# EAGLE board thundermaus (EAGLE 6.3)
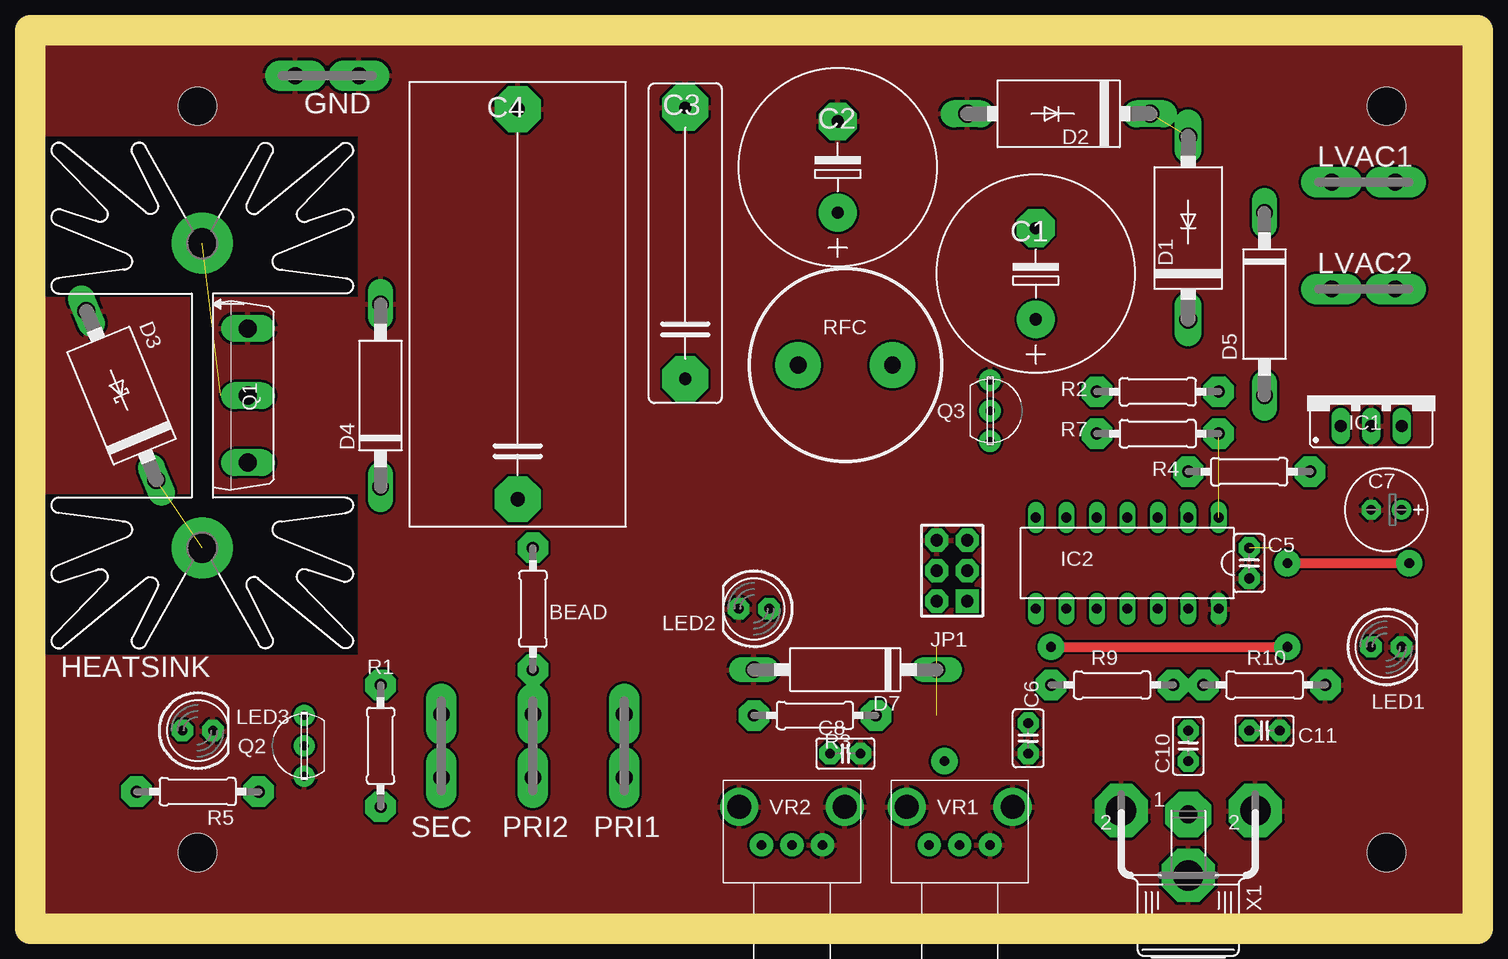
[diagram p0: board, top side]
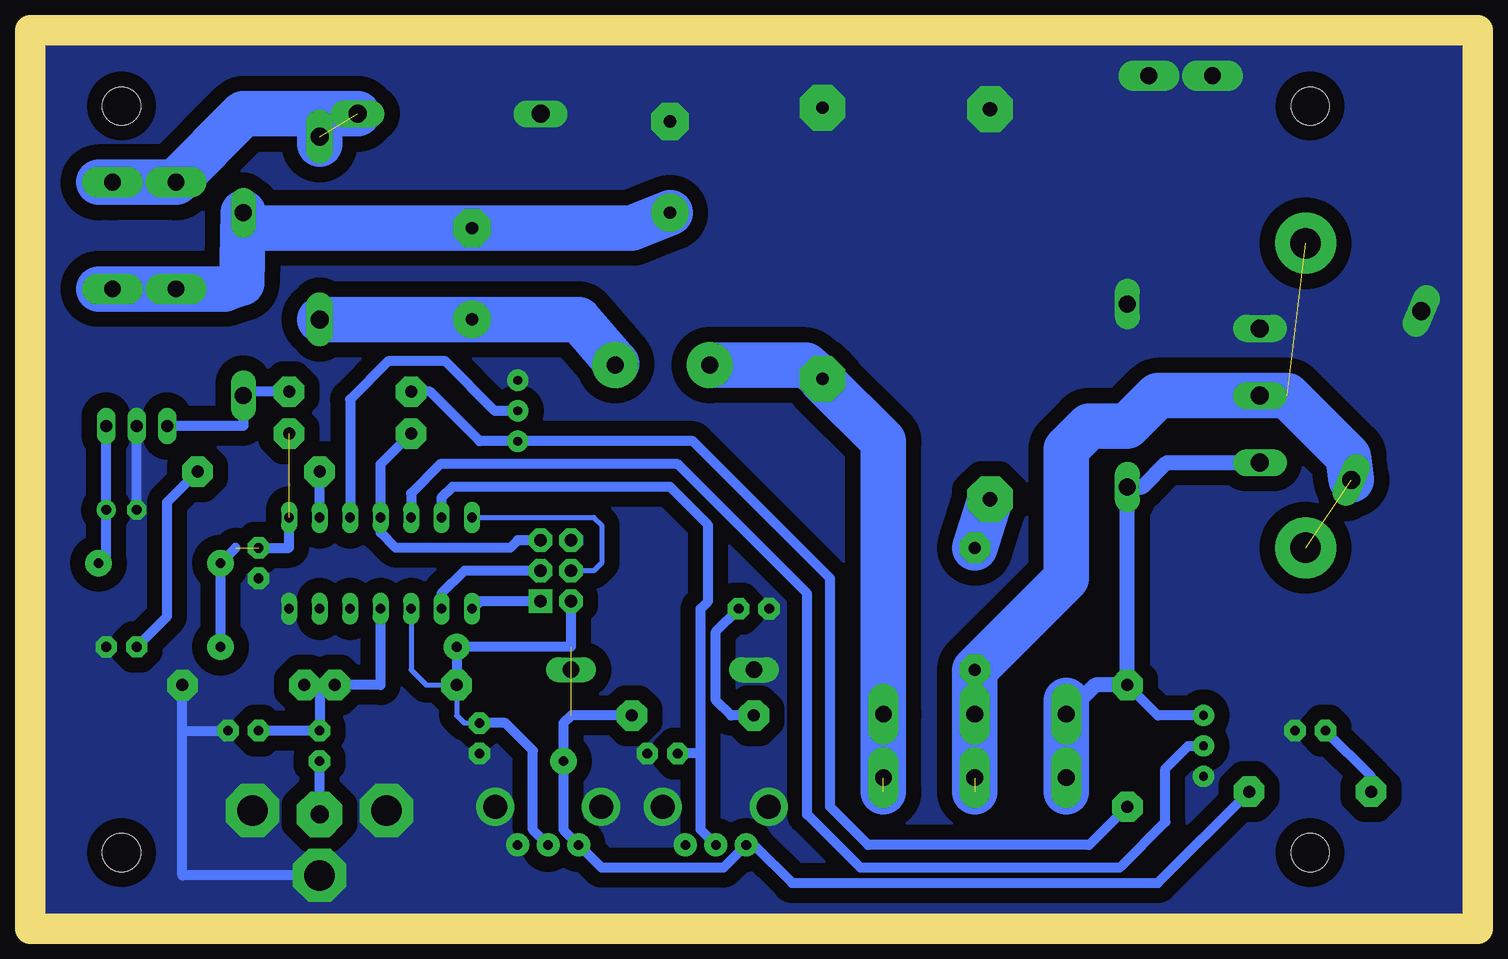
[diagram p1: board, bottom side, seen from below]

Size 120.65 x 74.93 mm. Coordinates in mm from the lower left corner, seen from the top.
Outline: 120.65,0 0,0 0,74.93 120.65,74.93 120.65,0
Copper layers (1*16): Top 0.035mm / dielectric 1.5mm / Bottom 0.035mm
Design rules "default *": minimum track width 10mil, minimum drill 24mil, track to track 8mil, track to pad 8mil, pad to pad 8mil, via to via 8mil, smd to smd 8mil, copper to edge 0mil, drill to drill 0mil, minimum pad ring 10mil, minimum via ring 8mil, stop-mask expansion 4mil, vias tented up to drill 0mil, thermal gap 10mil
Holes 3.17 mm at 113.03,68.58 13.97,68.58 13.97,6.35 113.03,6.35

## Footprints (pad centres in the part's own frame; a part is rotated, then mirrored left to right if it is on the bottom)
0207/10 = drill 1 pad 2.54 octagon: 1 -5.08,0; 2 5.08,0
E7,5-16 = drill 1.016 pad 3.15: + -3.81,0 | drill 1.016 pad 3.15 octagon: - 3.81,0
C225-062X268 = drill 1.016 pad 3.81 octagon: 1 -11.303,0; 2 11.303,0
C325-182X374 = drill 1.194 pad 3.81 octagon: 1 -16.256,0; 2 16.256,0
C025-025X050 = drill 0.813 pad 1.778 octagon: 1 -1.27,0; 2 1.27,0
E2,5-7 = drill 0.813 pad 1.6: + -1.27,0 | drill 0.813 pad 1.6 octagon: - 1.27,0
DO201-15 = drill 1.499 long: A 7.62,0; C -7.62,0
DO201T15 = drill 1.499 long: A 7.62,0; C -7.62,0
C1702-15 = drill 1.397 long: A 7.62,0; C -7.62,0
F061.060 = drill 1.4 pad 2.54 long: A1 -2.65,0; A2 2.65,0
SK129 = drill 2.54 pad 5.08: A2,5 -12.7,-0.889; B2,5 12.7,-0.889
78XXS = drill 1.016 long: GND 0,-2.54; IN -2.54,-2.54; OUT 2.54,-2.54
DIL14 = drill 0.813 long: 1 -7.62,-3.81; 2 -5.08,-3.81; 3 -2.54,-3.81; 4 0,-3.81; 5 2.54,-3.81; 6 5.08,-3.81; 7 7.62,-3.81; 8 7.62,3.81; 9 5.08,3.81; 10 2.54,3.81; 11 0,3.81; 12 -2.54,3.81; 13 -5.08,3.81; 14 -7.62,3.81
AVR-ISP-6 = drill 1.016 pad 1.93 square: 1 -2.54,-1.27 | drill 1.016 pad 1.93 octagon: 2 -2.54,1.27; 3 0,-1.27; 4 0,1.27; 5 2.54,-1.27; 6 2.54,1.27
LED5MM = drill 0.813 pad 1.778 octagon: A -1.27,0; K 1.27,0
TO247BV = drill 1.499 long: D 0,-2.921; G -5.588,-2.921; S 5.588,-2.921
TO237-SW = drill 0.737 pad 1.778: 1 2.54,0; 2 0,0; 3 -2.54,0
TJ4-U1 = drill 1.4 pad 3.81: 1 -3.935,0; 2 3.935,0
PTV09 = drill 0.8 pad 1.93: P1 -2.54,3.175; P2 0,3.175; P3 2.54,3.175 | drill 2 pad 3.175: P$4 4.407,6.35; P$5 -4.407,6.35
TOBU3 = drill 1.5 pad 3.81 octagon: 1 0,0 | drill 2.54 pad 4.445 octagon: 2 5.588,-0.318; 2@1 -5.588,-0.318; 2@2 0,5.08

## Placement (x,y rotation side)
BEAD  28B0500-100  [0207/10]  41.91,26.67 90 top
C1  2200u, 50v  [E7,5-16]  83.82,54.61 90 top
C2  2200u, 50v  [E7,5-16]  67.31,63.5 90 top
C3  1u  [C225-062X268]  54.61,57.15 90 top
C4  715P473512MD3  [C325-182X374]  40.64,52.07 90 top
C5  0.1u  [C025-025X050]  101.6,30.48 270 top
C6  0.1u  [C025-025X050]  83.19,15.88 270 top
C7  220u, 16V  [E2,5-7]  113.03,34.93 180 top
C8  0.1u  [C025-025X050]  67.94,14.61 0 top
C10  1u  [C025-025X050]  96.52,15.24 90 top
C11  100p  [C025-025X050]  102.87,16.51 0 top
D1  1N5401  [DO201-15]  96.52,58.42 90 top
D2  1N5401  [DO201-15]  85.72,67.94 180 top
D3  1.5KE350  [DO201T15]  7.62,44.45 112.5 top
D4  1N5353  [C1702-15]  29.21,44.45 90 top
D5  1N5353  [C1702-15]  102.87,52.07 270 top
D7  1N5353  [C1702-15]  67.94,21.59 180 top
GND  Keystone 1289  [F061.060]  24.77,71.12 0 top
HEATSINK  657-15ABP  [SK129]  15.24,44.45 270 top
IC1  LM7805  [78XXS]  111.76,44.45 0 top
IC2  TINY24/44/84-PU  [DIL14]  91.44,30.48 180 top
JP1  AVR-ISP-6VERT  [AVR-ISP-6]  76.83,29.84 90 top
LED1  [LED5MM]  113.03,23.5 0 top
LED2  [LED5MM]  60.33,26.67 180 top
LED3  [LED5MM]  13.97,16.51 0 top
LVAC1  Keystone 1289  [F061.060]  111.12,62.23 0 top
LVAC2  Keystone 1289  [F061.060]  111.12,53.34 0 top
PRI1  Keystone 1289  [F061.060]  49.53,15.24 270 top
PRI2  Keystone 1289  [F061.060]  41.91,15.24 270 top
Q1  FGH20N60SFD  [TO247BV]  15.24,44.45 90 top
Q2  2n7000  [TO237-SW]  22.86,15.24 90 top
Q3  2n7000  [TO237-SW]  80.01,43.18 270 top
R1  1k  [0207/10]  29.21,15.24 270 top
R2  4.7k  [0207/10]  93.98,44.77 0 top
R3  470.  [0207/10]  65.41,17.78 180 top
R4  470.  [0207/10]  101.6,38.1 0 top
R5  470.  [0207/10]  13.97,11.43 180 top
R7  10k  [0207/10]  93.98,41.28 180 top
R9  100k  [0207/10]  90.17,20.32 180 top
R10  100k  [0207/10]  102.87,20.32 180 top
RFC  LVP1620-250KL  [TJ4-U1]  67.94,46.99 180 top
SEC  Keystone 1289  [F061.060]  34.29,15.24 270 top
VR1  [PTV09]  77.47,3.81 0 top
VR2  [PTV09]  63.5,3.81 0 top
X1  TOBU3  [TOBU3]  96.52,9.53 180 top

## Library data of the parts
BEAD C1-C8 C10 C11 R1-R5 R7 R9 R10 RFC = rcl
D1-D5 D7 = diode
GND LVAC1 LVAC2 PRI1 PRI2 SEC = con-faston
HEATSINK = heatsink
IC1 = v-reg
IC2 JP1 = avr-7
LED1-LED3 = led
Q1 = transistor-power
Q2 Q3 = transistor-fet
VR1 VR2 = pot2
X1 = con-hirschmann

## Nets
5V: C5.1 C7.+ D7.C IC1.OUT IC2.1 JP1.2 R3.1 R5.1 R7.1 R9.2 VR1.P1 VR2.P1
16V: D5.A IC1.IN R2.2
70VDC: C1.+ D1.C RFC.1
AUDIO: C10.2 C11.1 IC2.11 R9.1 R10.2
AUDIO-IN: C10.1 X1.1
COLLECTOR: BEAD.1 D3.C HEATSINK.A2,5 HEATSINK.B2,5 PRI2.A1 PRI2.A2 Q1.D
GATE: D4.C Q1.G Q2.1 R1.1 SEC.A1 SEC.A2
GND: C2.- C3.2 C4.2 C5.2 C6.2 C7.- C8.2 C11.2 D2.A D3.A D4.A D7.A GND.A1 GND.A2 IC1.GND IC2.14 JP1.6 LED1.K LED2.K LED3.K Q1.S Q2.3 Q3.3 R10.1 VR1.P3 VR1.P$4 VR1.P$5 VR2.P3 VR2.P$4 VR2.P$5 X1.2 X1.2@1 X1.2@2
HVDC: C3.1 PRI1.A1 PRI1.A2 RFC.2
LED: IC2.2 R4.1
LED2-P: LED2.A R3.2
LED3-P: LED3.A R5.2
LEDP: LED1.A R4.2
LVAC1: D1.A D2.C LVAC1.A1 LVAC1.A2
LVAC2: C1.- C2.+ D5.C LVAC2.A1 LVAC2.A2
MISO: IC2.8 JP1.1
MOSI: IC2.7 JP1.4
PA3: C6.1 IC2.10 VR1.P2
PA7: C8.1 IC2.6 VR2.P2
PB1: IC2.3 Q3.2
PB2: IC2.5 Q2.2
PULLUP_DISABLE: Q3.1 R1.2 R2.1
RESONANT: BEAD.2 C4.1
RST: IC2.4 JP1.5 R7.2
SCK: IC2.9 JP1.3

## Tracks (layer width: path | path; a pad name or v marks a point on that pad's centre or on a via)
5V  (via drill 0.8 pad 2.18)  (4 unrouted)
  Top 0.813: v85.09,23.5 v104.77,23.5 | v104.77,30.48 v114.94,30.48
  Bottom 0.813: C5.1 99.06,31.75 IC2.1 | IC1.OUT C7.+ 114.3,31.11 v114.94,30.48 | 84.45,23.5 v85.09,23.5 | 84.45,23.5 75.56,23.5 JP1.2 | R9.2 85.09,22.86 84.45,23.5 | v104.77,23.5 v104.77,30.48 103.5,31.75 | R3.1 75.56,17.78 76.2,17.14 v76.2,13.97 76.2,8.26 VR1.P1 73.02,5.08 62.87,5.08 VR2.P1 60.33,6.98 57.15,3.81 26.67,3.81 R5.1
16V
  Bottom 0.813: IC1.IN 102.87,41.91 D5.A 102.87,44.77 R2.2
70VDC
  Bottom 3.81: D1.C C1.+ 74.93,50.8 71.75,47.12 RFC.1
AUDIO
  Bottom 0.813: 96.52,20.32 C10.2 C11.1 | 96.52,20.32 R10.2 | 96.52,20.32 R9.1 91.44,20.32 IC2.11
AUDIO-IN
  Bottom 0.813: X1.1 C10.1
COLLECTOR  (3 unrouted)
  Bottom 3.81: 41.91,11.43 PRI2.A1 BEAD.1 34.29,29.21 34.29,40.01 32.38,41.91 29.21,41.91 26.67,44.45 Q1.D 15.88,44.45 10.79,39.37 D3.C
GATE
  Bottom 0.813: 29.21,36.2 28.57,36.83 | Q2.1 26.67,17.78 R1.1
  Bottom 1.27: Q1.G 25.91,38.86 27.94,36.83 28.57,36.83 D4.C | 33.55,17.89 SEC.A1 31.86,20.32 R1.1 29.21,36.2
  Bottom 3.81: 34.29,19.05 SEC.A1 SEC.A2 34.29,11.43
GND
  Bottom 0.813: C7.- IC1.GND | 107.95,16.51 R10.1 | 107.95,16.51 107.95,4.45 X1.2@2 | 107.95,16.51 C11.2
  pour Bottom (isolate 1.27, no thermals): 119.38,1.27 119.38,73.66 1.27,73.66 1.27,1.27
  pour Top: 1.27,73.66 119.38,73.66 119.38,1.27 1.27,1.27
HVDC  (1 unrouted)
  Bottom 3.81: RFC.2 56.01,46.99 C3.1 54.61,45.72 49.53,40.64 PRI1.A1 49.53,11.43
LED
  Bottom 0.813: IC2.2 R4.1
LED2-P
  Bottom 0.813: R3.2 62.23,17.78 63.5,19.05 63.5,24.77 LED2.A
LED3-P
  Bottom 0.813: R5.2 8.89,12.7 LED3.A
LEDP
  Bottom 0.813: R4.2 109.22,35.56 109.22,26.04 LED1.A
LVAC1  (1 unrouted)
  Bottom 3.81: D2.C 102.87,67.94 108.47,62.34 LVAC1.A1 LVAC1.A2 114.94,62.23 | D1.A 96.52,65.41
LVAC2
  Bottom 3.81: C2.+ 70.48,58.42 C1.- 102.87,58.42 D5.C 103.02,53.83 104.44,53.34 LVAC2.A1 LVAC2.A2 114.94,53.34
MISO
  Bottom 0.813: JP1.1 83.19,27.3 IC2.8
MOSI
  Bottom 0.406: IC2.7 73.66,34.29 73.02,33.66 73.02,30.48 73.66,29.84 JP1.4
PA3
  Bottom 0.406: IC2.10 88.9,21.59 87.63,20.32 85.09,20.32 85.09,17.78 84.45,17.14 C6.1
  Bottom 0.813: C6.1 81.03,17.14 78.74,14.86 78.74,8.26 VR1.P2
PA7
  Bottom 0.813: 64.77,14.61 64.77,8.26 VR2.P2 | 64.77,14.61 64.77,26.67 64.14,27.3 64.14,33.66 67.31,36.83 85.46,36.83 86.36,35.93 IC2.6 | 64.77,14.61 C8.1
PB1
  Bottom 0.813: Q3.2 81.91,43.18 86.04,47.31 90.8,47.31 93.98,44.13 IC2.3
PB2
  Bottom 0.813: IC2.5 88.9,36.3 86.47,38.74 66.67,38.74 55.88,27.94 55.88,9.53 51.44,5.08 29.84,5.08 26.04,8.89 26.04,13.33 24.13,15.24 Q2.2
PULLUP_DISABLE
  Bottom 0.813: R1.2 32.38,6.98 50.8,6.98 53.98,10.16 53.98,29.21 65.41,40.64 Q3.1 83.19,40.64 87.31,44.77 R2.1
RESONANT
  Bottom 3.81: BEAD.2 C4.1
RST
  Bottom 0.813: R7.2 91.44,38.74 IC2.4 91.44,33.02 90.17,31.75 80.64,31.75 80.01,32.38 JP1.5
SCK
  Bottom 0.813: JP1.3 84.45,29.84 86.36,27.94 IC2.9